# Altium PCB PCB1.PcbDoc
Units mil, origin at the board's own origin, x right, y up, seen from the top; angles counter-clockwise.
Board outline 6000 x 4000 mil, 2 copper layers (Top Layer, Bottom Layer); 31 components, 24 nets, 109 pads, 0 vias.
Unrouted connection lines stored in the file: 60.
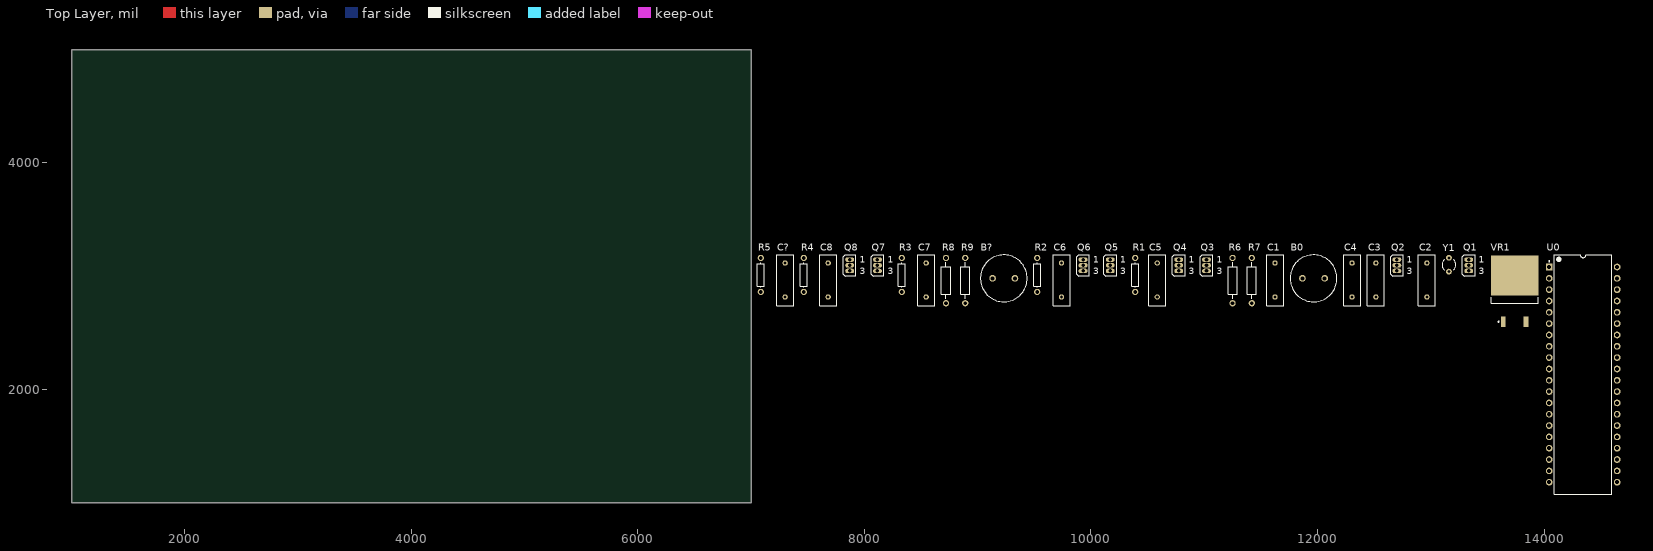
[diagram p0: Top Layer view]
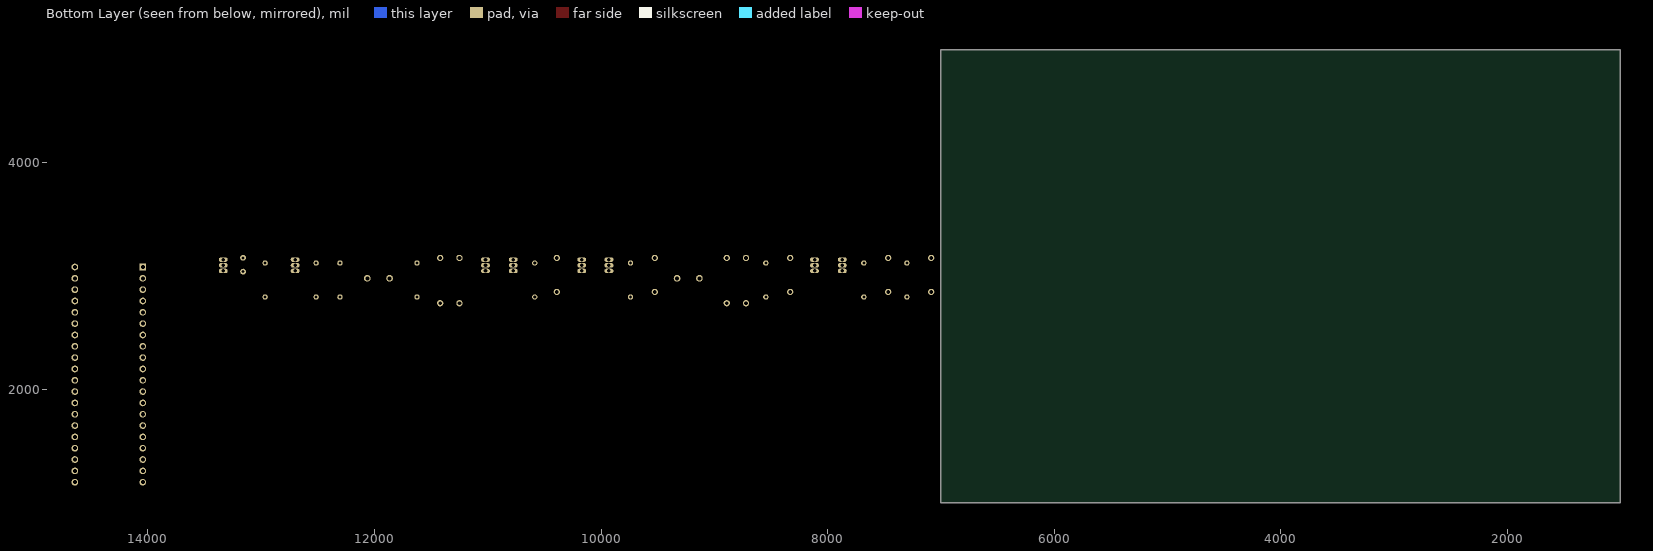
[diagram p1: Bottom Layer view, seen from below]

## Layer stack, top to bottom
Top Layer: signal copper 1.4
Dielectric: dielectric 12.6, FR-4, Dk 4.8
Bottom Layer: signal copper 1.4

## Board outline
1000,1000 7000,1000 7000,5000 1000,5000

## Design rules (kind name [scope] priority, off if disabled: settings)
Clearance [All] p1: gap=10
PolygonConnect [All] p1: connectstyle=Relief reliefconductorwidth=10 reliefentries=4 polygonreliefangle="90 Angle"
RoomDefinition Sheet1 [InComponentClass('Sheet1')] p1: confinementstyle=ConfineIn formatcopy=TRUE lockcomponents=FALSE outline 7045,1060 14685,1060 14685,3300 7045,3300
RoutingVias [All] p1: holewidth=28 width=50 viastyle="Through Hole" minholewidth=28 minwidth=50 maxholewidth=28 maxwidth=50
SilkscreenOverComponentPads [All] p1: minsilkscreentomaskgap=10
SolderMaskExpansion [All] p1: expansion=4
Width [All] p1: maxlimit=10 minlimit=10 preferedwidth=10
27 further rules are at their usual default settings.

## Components (designator, comment, footprint, x,y, rotation, side; value= is the part's Value field where it differs from the comment)
B0 "Motor" RB5-10.5 11965,2980 r0 top
B? "Motor" RB5-10.5 9230,2980 r0 top
C1 "Cap" RAD-0.3 11625,2965 r90 top
C2 "Cap" RAD-0.3 12965,2965 r90 top
C3 "Cap" RAD-0.3 12515,2965 r90 top
C4 "Cap" RAD-0.3 12305,2965 r90 top
C5 "Cap" RAD-0.3 10585,2965 r90 top
C6 "Cap" RAD-0.3 9740,2965 r90 top
C7 "Cap" RAD-0.3 8545,2965 r90 top
C8 "Cap" RAD-0.3 7680,2965 r90 top
C? "Cap" RAD-0.3 7300,2965 r90 top
Q1 "IRF540" BCY-W3/B.8 13335,3095 r0 top
Q2 "IRF540" BCY-W3/B.8 12700,3095 r0 top
Q3 "IRF9540" BCY-W3/B.8 11020,3095 r0 top
Q4 "IRF9540" BCY-W3/B.8 10775,3095 r0 top
Q5 "IRF540" BCY-W3/B.8 10170,3095 r0 top
Q6 "IRF540" BCY-W3/B.8 9930,3095 r0 top
Q7 "IRF9540" BCY-W3/B.8 8115,3095 r0 top
Q8 "IRF9540" BCY-W3/B.8 7870,3095 r0 top
R1 "Res1" AXIAL-0.3 10390,3010 r90 top
R2 "Res1" AXIAL-0.3 9525,3010 r90 top
R3 "Res1" AXIAL-0.3 8330,3010 r90 top
R4 "Res1" AXIAL-0.3 7465,3010 r90 top
R5 "Res1" AXIAL-0.3 7085,3010 r90 top
R6 "Res2" AXIAL-0.4 11250,2960 r90 top
R7 "Res2" AXIAL-0.4 11420,2960 r90 top
R8 "Res2" AXIAL-0.4 8720,2960 r90 top
R9 "Res2" AXIAL-0.4 8890,2960 r90 top
U0 "PIC18F45K20-I/P" PDIP600-P40 14345,2130 r0 top
VR1 "7805" TO254P1510-3_4N 13740,2865 r90 top
Y1 "20MHz" BCY-W2/D3.1 13160,3100 r0 top

## Footprints (in the part's own frame and the unit in brackets; to place one, negate y for a bottom-side part, rotate by r counter-clockwise, add the part's x,y. Pads: shape width x height; smd on the part's side, far side on the other; paste and mask are expansions set on the pad)
AXIAL-0.3 [mm] "Axial Device, Thru-Hole; 2 Leads; 0.3 in Pin Spacing"
  round 1.4 hole 0.85: 1(-3.81,0) 2(3.81,0)
  silkscreen extent -2.77,-0.76 2.77,0.76
AXIAL-0.4 [mm] "Axial Device, Thru-Hole; 2 Leads; 0.4 in Pin Spacing"
  round 1.4 hole 0.85: 1(-5.08,0) 2(5.08,0)
  silkscreen extent -4.06,-1.02 4.06,1.02
BCY-W2/D3.1 [mm] "Crystal, Thru-Hole; 2 Leads; Body 3.1 x 8.2 mm (Dia.xH)"
  round 1.3 hole 0.7: 1(0,1.55) 2(0,-1.55)
  silkscreen extent -1.55,-1.19 1.55,1.17
BCY-W3/B.8 [mm] "TO, Flat Index; 3 In-Line, Axial Leads; Body Dia. 4.6mm; Lead Dia. 0.5 mm (max)"
  oval 2x1 hole 0.8: 1(0,1.27) 2(0,0) 3(0,-1.27)
  silkscreen extent -1.41,-2.41 1.41,2.41
PDIP600-P40 [mm] "DIP, 40-Leads, Row Spacing 15.24mm, Pitch 2.54mm, Body 51.8x13.5mm"
  rect 1.5x1.5 hole 0.9: 1(-7.62,24.13)
  round 1.5 hole 0.9: 2(-7.62,21.59) 3(-7.62,19.05) 4(-7.62,16.51) 5(-7.62,13.97) 6(-7.62,11.43) 7(-7.62,8.89) 8(-7.62,6.35) 9(-7.62,3.81) 10(-7.62,1.27) 11(-7.62,-1.27) 12(-7.62,-3.81) 13(-7.62,-6.35) 14(-7.62,-8.89) 15(-7.62,-11.43) 16(-7.62,-13.97) 17(-7.62,-16.51) 18(-7.62,-19.05) 19(-7.62,-21.59) 20(-7.62,-24.13) 21(7.62,-24.13) 22(7.62,-21.59) 23(7.62,-19.05) 24(7.62,-16.51) 25(7.62,-13.97) 26(7.62,-11.43) 27(7.62,-8.89) 28(7.62,-6.35) 29(7.62,-3.81) 30(7.62,-1.27) 31(7.62,1.27) 32(7.62,3.81) 33(7.62,6.35) 34(7.62,8.89) 35(7.62,11.43) 36(7.62,13.97) 37(7.62,16.51) 38(7.62,19.05) 39(7.62,21.59) 40(7.62,24.13)
  silkscreen extent -7.74,-26.85 6.45,26.85, body extent -7.3,-26.85 7.3,26.85, height 6.35
RAD-0.3 [mm] "Radial Cap, Thru-Hole; 2 Leads; 0.3 in Pin Spacing"
  round 1.2 hole 0.7: 1(-3.81,0) 2(3.81,0)
  silkscreen extent -5.71,-1.91 5.71,1.91
RB5-10.5 [mm] "Motor, General Kind; 2 Leads"
  round 1.5 hole 0.9: 1(-2.5,0) 2(2.5,0)
  silkscreen extent -5.25,-5.25 5.25,5.25
TO254P1510-3_4N [mm] "D2-PAK, 4-Leads, Body 8.8x10.4mm, Pitch 2.54mm, Lead Span 15.1mm, IPC Medium Density"
  rect 2.4x1.05 smd: 1(-6.8,2.54) 3(-6.8,-2.54)
  rect 8.9x10.65 smd: 2(3.55,0)
  silkscreen extent -6.92,-5.25 -1.3,5.25, body extent -2.7,-5.28 6.3,5.28, height 4.69

## Part data
B0 B?: "Motor, General Kind"
C1 C2 C3 C4 C5 C6 C7 C8 C?: "Capacitor"
Q1 Q2 Q5 Q6: library part MOSFET-N, "N-Channel MOSFET"
Q3 Q4 Q7 Q8: library part MOSFET-P, "P-Channel MOSFET"
R1 R2 R3 R4 R5 R6 R7 R8 R9: "Resistor"
U0: "Flash Microcontroller with 10-Bit A/D and nanoWatt Technology, 32K Flash, 40-Pin PDIP, Industrial Temperature Range"
VR1: library part "Volt Reg", "Voltage Regulator"
Y1: library part XTAL, "Crystal Oscillator"

## Nets (pads, with @x,y where several pads share a name; then routed paths per layer and width w, separated by ;. In a path a pad name is that pad's centre, name@x,y a point inside that pad or via, vN(x,y) a via of type N, cw(c..) or ccw(c..) an arc to the next point about the centre after c; other vN are vias at no path point)
5V: C2.2 Q3.3 Q4.1 Q7.3 Q8.1 R1.1 R2.1 R3.1 R4.1 U0.11 U0.32 VR1.3
+5V: C?.2
GND: C1.1 C2.1 C3.1 C4.1 C5.2 C6.1 C7.1 C8.1 Q1.1 Q2.3 Q5.1 Q6.3 R5.1 U0.12 U0.31
NetB0_1: B0.1 Q2.1 Q4.3
NetB0_2: B0.2 Q1.3 Q3.1
NetB?_1: B?.1 Q6.1 Q8.3
NetB?_2: B?.2 Q5.3 Q7.1
NetC1_2: C1.2 VR1.2
NetC3_2: C3.2 U0.14 Y1.2
NetC4_2: C4.2 U0.13 Y1.1
NetC5_1: C5.1 R1.2 U0.20
NetC6_2: C6.2 R2.2 U0.19
NetC7_2: C7.2 R3.2 U0.21
NetC8_2: C8.2 R4.2 U0.22
NetC?_1: C?.1 R5.2 U0.1
NetQ1_2: Q1.2 Q3.2 R6.2
NetQ2_2: Q2.2 Q4.2 R7.2
NetQ5_2: Q5.2 Q7.2 R8.2
NetQ6_2: Q6.2 Q8.2 R9.2
NetR6_1: R6.1 U0.2
NetR7_1: R7.1 U0.3
NetR8_1: R8.1 U0.4
NetR9_1: R9.1 U0.5
VCC: VR1.1
pads on no net: U0.6 U0.7 U0.8 U0.9 U0.10 U0.15 U0.16 U0.17 U0.18 U0.23 U0.24 U0.25 U0.26 U0.27 U0.28 U0.29 U0.30 U0.33 U0.34 U0.35 U0.36 U0.37 U0.38 U0.39 U0.40

## Text inside footprints (layer, text, board x,y; h text height)
Q1: Top Overlay "1" at 13424.57,3116.85 h59.05; Top Overlay "3" at 13424.57,3017.72 h59.05
Q2: Top Overlay "1" at 12789.57,3116.85 h59.05; Top Overlay "3" at 12789.57,3017.72 h59.05
Q3: Top Overlay "1" at 11109.57,3116.85 h59.05; Top Overlay "3" at 11109.57,3017.72 h59.05
Q4: Top Overlay "1" at 10864.57,3116.85 h59.05; Top Overlay "3" at 10864.57,3017.72 h59.05
Q5: Top Overlay "1" at 10259.57,3116.85 h59.05; Top Overlay "3" at 10259.57,3017.72 h59.05
Q6: Top Overlay "1" at 10019.57,3116.85 h59.05; Top Overlay "3" at 10019.57,3017.72 h59.05
Q7: Top Overlay "1" at 8204.57,3116.85 h59.05; Top Overlay "3" at 8204.57,3017.72 h59.05
Q8: Top Overlay "1" at 7959.57,3116.85 h59.05; Top Overlay "3" at 7959.57,3017.72 h59.05